# Altium PCB linkit-v4-0.2_6layers - Copie.PcbDoc (part 3 of 4)
Units mm, origin at the board's own origin, x right, y up, seen from the top; angles counter-clockwise.
Board outline 70 x 35 mm, 6 copper layers (Top Layer, Int1 (GND), Int2 (Sign), Int3 (Sign), Int4 (PWR), Bottom Layer), stack 1.551 mm thick; 193 components, 157 nets, 777 pads, 248 vias.
Unrouted connection lines stored in the file: 164.
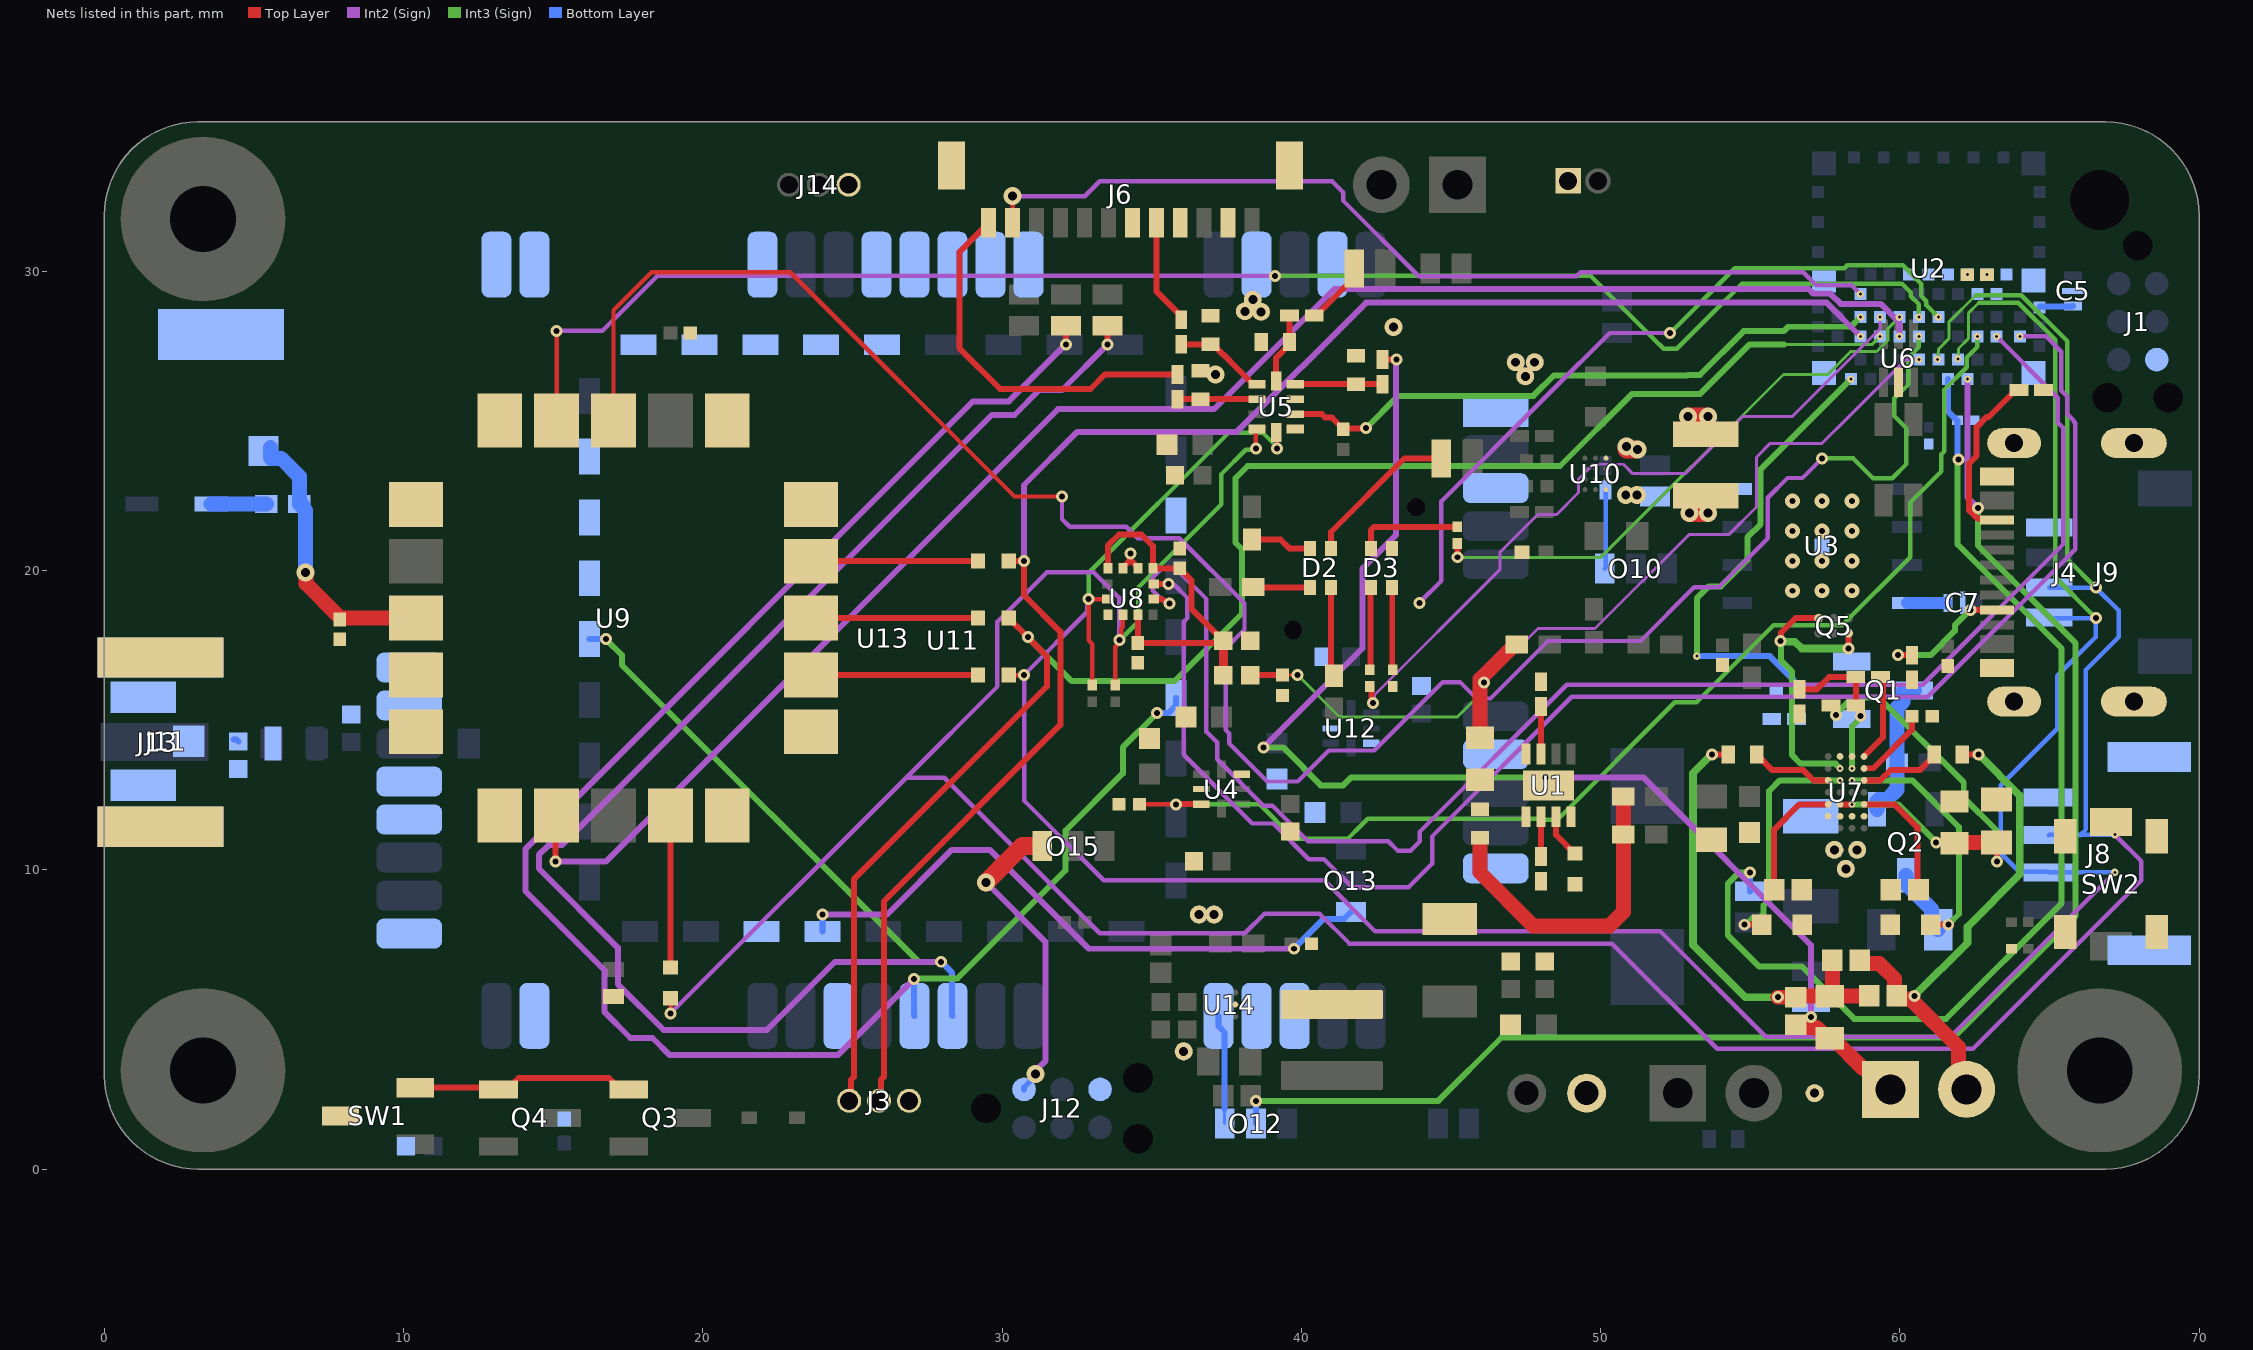
[diagram p6: the nets of this part, all layers, seen from the top]

## Part data (continued)
R41: "Thick Film Resistors - SMD 1/16watt 3.3Kohms 1% 100ppm", Manufacturer_Name=Vishay, Mouser Part Number=71-CRCW0402-3.3K-E3, Arrow Part Number=CRCW04023K30FKED, Arrow Price/Stock=https://www.arrow.com/en/products/crcw04023k30fked/vishay, Datasheet Link=http://www.vishay.com/docs/20035/dcrcwe3.pdf, Height=0.4mm, Manufacturer_Part_Number=CRCW04023K30FKED, Mouser Price/Stock=https://www.mouser.co.uk/ProductDetail/Vishay-Dale/CRCW04023K30FKED?qs=iv%252Be0Bc5VY2uvlCcTQHBWQ%3D%3D
R43 R44: "Thick Film Resistors - SMD 1/20watt 22ohms 1% 200ppm", Manufacturer_Name=Panasonic, Datasheet Link=https://industrial.panasonic.com/cdbs/www-data/pdf/RDP0000/AOA0000C334.pdf, Height=0.4mm, Manufacturer_Part_Number=ERJ-U02F22R0X
R45: "Thick Film Resistors - SMD 36.5Kohm 1% 200ppm", Manufacturer_Name=Vishay, Datasheet Link=http://www.vishay.com/docs/20035/dcrcwe3.pdf, Height=0.28mm, Manufacturer_Part_Number=CRCW020136K5FNED
R46 R49: "Thick Film Resistors - SMD 0 Ohms 50mW 0201 1%", Manufacturer_Name=KEMET, Mouser Part Number=603-RC0201FR-070RL, Arrow Part Number=RC0201FR-070RL, Arrow Price/Stock=https://www.arrow.com/en/products/rc0201fr-070rl/yageo?region=nac, Datasheet Link=http://www.yageo.com/documents/recent/PYu-RC0201_51_RoHS_L_8.pdf, Height=0.26mm, Manufacturer_Part_Number=RC0201FR-070RL, Mouser Price/Stock=https://www.mouser.co.uk/ProductDetail/YAGEO/RC0201FR-070RL?qs=LWWr1WFOkdETHfAClQk8Xg%3D%3D
R47: "Thick Film Resistors - SMD 1/20W 2.74Kohms 1% 200ppm", Manufacturer_Name=Vishay, Datasheet Link=http://www.vishay.com/docs/20035/dcrcwe3.pdf, Height=0.28mm, Manufacturer_Part_Number=CRCW02012K74FNED
R48: "Thick Film Resistors - SMD 1/20watt 100Kohms 5% 200ppm", Manufacturer_Name=Vishay, Mouser Part Number=71-CRCW0201100KJNED, Arrow Part Number=CRCW0201100KJNED, Arrow Price/Stock=https://www.arrow.com/en/products/crcw0201100kjned/vishay, Datasheet Link=http://www.vishay.com/docs/20035/dcrcwe3.pdf, Height=0.28mm, Manufacturer_Part_Number=CRCW0201100KJNED, Mouser Price/Stock=https://www.mouser.co.uk/ProductDetail/Vishay-Dale/CRCW0201100KJNED?qs=IQLUlsvFoXu8A8gHIw6owA%3D%3D
R50: "Thick Film Resistors - SMD 1/16watt 49.9Kohms 1%", Manufacturer_Name=Vishay, Mouser Part Number=71-CRCW0402-49.9K-E3, Arrow Part Number=CRCW040249K9FKED, Arrow Price/Stock=https://www.arrow.com/en/products/crcw040249k9fked/vishay?region=nac, Datasheet Link=http://www.vishay.com/docs/20035/dcrcwe3.pdf, Height=0.4mm, Manufacturer_Part_Number=CRCW040249K9FKED, Mouser Price/Stock=https://www.mouser.co.uk/ProductDetail/Vishay-Dale/CRCW040249K9FKED?qs=hAuyw6LW%252BLhwjtjsHx%2FGDQ%3D%3D
R52 R53 R54 R55 R56: "Thick Film Resistors - SMD CRCW 402 jumper", Manufacturer_Name=Vishay, Mouser Part Number=71-CRCW04020000Z0EEH, Arrow Part Number=CRCW04020000Z0EEHP, Arrow Price/Stock=https://www.arrow.com/en/products/crcw04020000z0eehp/vishay?utm_currency=USD&region=nac, Datasheet Link=http://www.vishay.com/docs/20035/dcrcwe3.pdf, Height=0.4mm, Manufacturer_Part_Number=CRCW04020000Z0EEHP, Mouser Price/Stock=https://www.mouser.co.uk/ProductDetail/Vishay-Dale/CRCW04020000Z0EEHP?qs=Imq1NPwxi74NTc567q7flQ%3D%3D
SW1: "Board Mount Hall Effect/Magnetic Sensors Integrated Digital Omnipolar, TMR, High Sensitivity Magnetic Switch, SOT23 Package, Ind Temp, 2Hz", Manufacturer_Name="Allegro MicroSystems", Mouser Part Number=462-CT8132BV-IS3, Datasheet Link=https://www.mouser.fr/datasheet/2/1115/Allegro_DS_CT813x_Datasheet_GS_FINAL_R2_v2-3441103.pdf, Height=1.4mm, Manufacturer_Part_Number=CT8132BV-IS3, Mouser Price/Stock=https://www.mouser.fr/ProductDetail/Allegro-MicroSystems/CT8132BV-IS3?qs=GBLSl2Akirsc7cUAudCqXg%3D%3D
SW2: "SW SPST PB 50MA 12V SMT CK variant", Manufacturer=C&K, Manufacturers Part Number="PTS820J2xM SMTR LFS", Supplier Part Number 1=611-PTS820J25MSMTR, Distributor 1=EBV, Distributor 2="Future Electronics", Supplier 1=Mouser, Supplier 2=Digi-Key, Supplier Part Number 2=CKN10505CT-ND
U1: "Battery Management 800-mA linear batter y charger for one-ce", Manufacturer_Name="Texas Instruments", Mouser Part Number=595-BQ25176MDSGR, Arrow Part Number=BQ25176MDSGR, Arrow Price/Stock=https://www.arrow.com/en/products/bq25176mdsgr/texas-instruments?region=nac, Datasheet Link=https://www.ti.com/lit/gpn/bq25176m, Height=0.8mm, Manufacturer_Part_Number=BQ25176MDSGR, Mouser Price/Stock=https://www.mouser.co.uk/ProductDetail/Texas-Instruments/BQ25176MDSGR?qs=Y0Uzf4wQF3nVhcdITj52nA%3D%3D
U2: "IC ISP Smart Bluetooth Module", Manufacturer=InsightSIP, Manufacturers Part Number=ISP1807-LR-ST, Temp Max=85, Temp Min=-40, Supplier 1=Rutronik, Supplier 2=Mouser, Supplier Part Number 1=ISP1807-LR-ST, Supplier Part Number 2=359-ISP1807-LR-ST, Supplier Unit Price 1=8.5
U3: "IC MEM SERIAL NOR FLASH QSPI 128Mb/16MB 3.6V 166MHz WSON8 6X5", Manufacturer=ISSI, Supplier Part Number 1=2901145, Temp Max=105, Temp Min=-40, Distributor 1=EBV, Distributor 2="Future Electronics", Manufacturers Part Number=IS25LP128F-JKLE, Supplier 1=Farnell, Supplier 2=Mouser, Supplier Part Number 2=870-IS25LP128FJKLETR
U4 U12: "Power Switch ICs - Power Distribution Low Input VTG Dual L oad Switch", Manufacturer_Name="Texas Instruments", Mouser Part Number=595-TPS22960RSER, Arrow Part Number=TPS22960RSER, Arrow Price/Stock=https://www.arrow.com/en/products/tps22960rser/texas-instruments?region=nac, Datasheet Link=https://www.ti.com/lit/ds/symlink/tps22960.pdf?ts=1638681846865&ref_url=https%253A%252F%252Fwww.google.com%252F, Height=0.6mm, Manufacturer_Part_Number=TPS22960RSER, Mouser Price/Stock=https://www.mouser.co.uk/ProductDetail/Texas-Instruments/TPS22960RSER?qs=EQxOuqCyzqQpKHLEcq5RSg%3D%3D
U5: "Analog to Digital Converters - ADC 16B ADC w/ Int MUX P GA Comp Osc & Ref A", Manufacturer_Name="Texas Instruments", Mouser Part Number=595-ADS1115IRUGR, Arrow Part Number=ADS1115IRUGR, Arrow Price/Stock=https://www.arrow.com/en/products/ads1115irugr/texas-instruments?utm_currency=USD&region=nac, Datasheet Link=https://www.ti.com/lit/ds/symlink/ads1115.pdf?ts=1601235703022&ref_url=https%253A%252F%252Fwww.ti.com%252Fproduct%252FADS1115%253FkeyMatch%253DADS1115IRUGR%2526tisearch%253DSearch-EN-everything%2526usecase%253DOPN, Height=0.4mm, Manufacturer_Part_Number=ADS1115IRUGR, Mouser Price/Stock=https://www.mouser.co.uk/ProductDetail/Texas-Instruments/ADS1115IRUGR?qs=IK5e5L0zOXhqw%2F8AHSSbuA%3D%3D
U6: "ESD Suppressors / TVS Diodes High Speed Interface Protection Low Cap", Manufacturer_Name=STMicroelectronics, Datasheet Link=https://datasheet.lcsc.com/szlcsc/STMicroelectronics-USBLC6-2P6_C15999.pdf, Height=0.6mm, Manufacturer_Part_Number=USBLC62P6
U7: "Wireless Charging ICs Wireless Pwr Receivr A 595-BQ51003YFPR", Manufacturer_Name="Texas Instruments", Mouser Part Number=595-BQ51003YFPT, Arrow Part Number=BQ51003YFPT, Arrow Price/Stock=https://www.arrow.com/en/products/bq51003yfpt/texas-instruments?region=nac, Datasheet Link=http://www.ti.com/lit/gpn/BQ51003, Height=0.5mm, Manufacturer_Part_Number=BQ51003YFPT, Mouser Price/Stock=https://www.mouser.co.uk/ProductDetail/Texas-Instruments/BQ51003YFPT?qs=QCUnHQQYO1rX6GZ4rUhwCg%3D%3D
U8: "IC AXL Accel/temp SPI/I2C 12LGA", Manufacturer="Bosch Sensortec", Supplier Part Number 1=828-1081-1-ND, Temp Max=85, Temp Min=-40, Manufacturers Part Number=BMA400, Supplier 1=Digi-Key, Supplier 2=Mouser, Supplier Part Number 2=262-BMA400
U9: "GNSS / GPS Modules u-blox M10 GNSS antenna module ROM, TCXO, SAW, LNA LGA, 16x16 mm", Manufacturer_Name=U-Blox, Mouser Part Number=377-SAM-M10Q-00B, Datasheet Link=https://content.u-blox.com/sites/default/files/documents/SAM-M10Q_DataSheet_UBX-22013293.pdf, Height=6.8mm, Manufacturer_Part_Number=SAM-M10Q-00B, Mouser Price/Stock=https://www.mouser.co.uk/ProductDetail/u-blox/SAM-M10Q-00B?qs=vvQtp7zwQdOaA6LplTUKjg%3D%3D
U10: "Switching Voltage Regulators 5.5-V buck-boost con verter with 75-nA op", Manufacturer_Name="Texas Instruments", Mouser Part Number=595-TPS63901YCJR, Arrow Part Number=TPS63901YCJR, Arrow Price/Stock=https://www.arrow.com/en/products/tps63901ycjr/texas-instruments?region=nac, Datasheet Link=https://www.ti.com/lit/ds/symlink/tps63901.pdf?ts=1658737279065&ref_url=https%253A%252F%252Fwww.ti.com%252Fproduct%252FTPS63901%253FkeyMatch%253DTPS63901YCJR%2526tisearch%253Dsearch-everything%2526usecase%253DOPN, Height=0.35mm, Manufacturer_Part_Number=TPS63901YCJR, Mouser Price/Stock=https://www.mouser.co.uk/ProductDetail/Texas-Instruments/TPS63901YCJR?qs=vvQtp7zwQdNZy3FE2e2hqg%3D%3D
U11: "KIM2 Module 48 pins 1.27mm pitch 36.6 x 25.4 x 5mm", Manufacturer=Kineis, Rating=3.3-5V, Tolerance="-30 /  +55°C", BOI="SMD48 36.6x25.4x5mm", DESIG="KIMFLEX Module 48 pins 1.27mm pitch 36.6 x 25.4 x 5mm", K P/N=-, Manufacturer P/N=KIM2, Supplier=Kineis, Supplier P/N=KIMFLEX, VAL=KIM2
U13: "Arribada SMD module Argos comunication with PA GR5504"
U14: "Switching Voltage Regulators 95-nA low IQ 5.5-V b oost converter with INLIMIT (1.9A)", Manufacturer_Name="Texas Instruments", Mouser Part Number=595-TPS612997YBHR, Arrow Part Number=TPS612997YBHR, Arrow Price/Stock=https://www.arrow.com/en/products/tps612997ybhr/texas-instruments?utm_currency=USD&region=nac, Datasheet Link=https://www.ti.com/lit/gpn/tps61299, Height=0.4mm, Manufacturer_Part_Number=TPS612997YBHR, Mouser Price/Stock=https://www.mouser.co.uk/ProductDetail/Texas-Instruments/TPS612997YBHR?qs=mELouGlnn3dLhnQxUdz5hw%3D%3D

## Via types
v1: diameter 0.6, hole 0.3, Top Layer to Int4 (PWR), 43 vias
v2: diameter 0.4, hole 0.2, Top Layer to Int3 (Sign), 42 vias
v3: diameter 0.25, hole 0.1, Int2 (Sign) to Bottom Layer, 23 vias
v4: diameter 0.6, hole 0.3, Int4 (PWR) to Bottom Layer, 20 vias
v5: diameter 0.4, hole 0.2, Int2 (Sign) to Bottom Layer, 20 vias
v6: diameter 0.4, hole 0.2, Top Layer to Int2 (Sign), 17 vias
v7: diameter 0.4, hole 0.2, Int3 (Sign) to Bottom Layer, 16 vias
v8: diameter 0.25, hole 0.1, Int3 (Sign) to Bottom Layer, 15 vias
v9: diameter 0.5, hole 0.2, Top Layer to Bottom Layer, 12 vias
v10: diameter 0.4, hole 0.2, Int2 (Sign) to Int3 (Sign), 10 vias
v11: diameter 0.25, hole 0.1, Top Layer to Bottom Layer, 7 vias
v12: diameter 0.6, hole 0.3, Top Layer to Bottom Layer, 6 vias
v13: diameter 0.226, hole 0.1, Top Layer to Int3 (Sign), 5 vias
v14: diameter 0.4, hole 0.2, Top Layer to Bottom Layer, 4 vias
v15: diameter 0.169, hole 0.1, Top Layer to Int3 (Sign), 2 vias
v16: diameter 0.6, hole 0.3, Top Layer to Int3 (Sign), 2 vias
v17: diameter 0.4, hole 0.2, Int4 (PWR) to Bottom Layer, 1 vias
v18: diameter 0.3, hole 0.2, Top Layer to Int1 (GND), 1 vias
v19: diameter 0.6, hole 0.3, Top Layer to Int2 (Sign), 1 vias
v20: diameter 0.25, hole 0.1, Int1 (GND) to Bottom Layer, 1 vias

## Nets (pads, with @x,y where several pads share a name; then routed paths per layer and width w, separated by ;. In a path a pad name is that pad's centre, name@x,y a point inside that pad or via, vN(x,y) a via of type N, cw(c..) or ccw(c..) an arc to the next point about the centre after c; other vN are vias at no path point)
ADC0: O7.2 R27.1 | length 39.4
  Top Layer w0.2: R27.1@42.718,27.052 v6(43.18,27.052)
  Int2 (Sign) w0.2: v10(38.735,14.097) 42.037,17.399 42.037,20.066 43.169,21.198 43.169,27.041 v6(43.18,27.052) ; v10(48.154,13.081) 51.435,13.081 57.023,7.493 v5(57.023,5.08)
  Int3 (Sign) w0.2: v10(38.735,14.097) 39.389,14.097 40.095,13.392 40.095,13.38 40.647,12.827 41.4,12.827 41.654,13.081 v10(48.154,13.081)
  Bottom Layer w0.2: v5(57.023,5.08) O7.2@57.023,5.575
ADC1: O8.2 R30.1 | length 2.2
  Top Layer w0.2: R30.1@40.428,28.522 40.541,28.522 40.641,28.622 40.641,28.664 41.77,29.794 O8.2@41.77,30.099
ADC2: J6.5 R32.1 | length 3.6
  Top Layer w0.2: J6.5@35.154,31.623 35.154,29.332 35.987,28.499 R32.1@35.987,28.387
ADC3: J6.12 R51.1 | length 12.6
  Top Layer w0.2: J6.12@29.554,31.623 28.575,30.644 28.575,27.432 29.937,26.07 32.954,26.07 33.436,26.552 R51.1@35.864,26.552
ADC_ALERT_RDY: R28.2 U2.64 U5.2 | length 20.6
  Top Layer w0.2: U5.2@39.797,25.228 40.685,25.228 40.798,25.115 41.021,25.115 41.402,24.734 41.413,24.744 42.143,24.744 v2(42.164,24.765)
  Int3 (Sign) w0.2: v2(42.164,24.765) 43.238,25.839 47.753,25.839 48.442,26.528 52.909,26.528 52.924,26.543 53.319,26.543 54.778,28.003 56.117,28.003 56.263,28.149 58.045,28.149 58.36,28.149 v8(58.685,28.474)
AGND: C14.2 C15.2 C16.2 C57.2 V?1.1 V?2.1 V?3.1 | length 0.6
  Top Layer w0.2: C57.2@36.626,26.678 36.687,26.617 37.071,26.617 v16(37.132,26.556)
  other v16: 43.076,28.133
BAT_AN: C4.2 O5.1 U2.38 | length 36.3
  Int3 (Sign) w0.2: v7(54.991,9.906) 54.61,9.906 54.248,9.544 54.248,7.816 55.288,6.776 56.724,6.776 58.474,5.026 61.541,5.026 65.405,8.89 65.405,17.399 61.924,20.88 61.924,23.676 v7(61.961,23.712)
  Bottom Layer w0.2: O5.1@54.991,9.284 v7(54.991,9.906) ; U2.38@61.61,26.399 61.61,25.313 61.904,25.019 C4.2@61.924,25.019 61.924,23.749 v7(61.961,23.712)
BAT_READ_EN: R3.2 R22.2 U2.48 | length 15.6
  Int3 (Sign) w0.2: v8(53.213,17.145) 53.213,19.072 53.618,19.477 54.021,19.477 54.902,20.358 54.902,21.109 55.346,21.553 55.346,23.385 57.107,25.146 v8(58.36,26.399)
  Bottom Layer w0.2: v8(53.213,17.145) 55.654,17.145 56.44,16.359 56.44,16.108 R22.2@56.546,16.002
BMA_PWR: C37.2 C38.2 R29.1 R31.2 U8.3 U8.7 U8.10 | length 12.2
  Top Layer w0.2: U8.10@33.54,20.079 33.54,20.843 33.906,21.209 34.654,21.209 35.04,20.823 U8.7@35.04,20.079 C37.2@35.941,20.079 35.941,20.059 36.322,19.678 36.322,18.727 R29.1@37.396,17.653 37.325,17.582 C38.2@34.537,17.582 34.54,17.586 U8.3@34.54,18.529
  Top Layer w0.3: R31.2@37.396,16.51 R29.1@37.396,17.653
BOOT1: C29.2 U7.C4 | length 4.2
  Top Layer w0.2: C29.2@55.798,9.328 55.798,11.348 56.642,12.192 U7.C4@57.601,12.192
BOOT2: C34.2 U7.C1 | length 4.2
  Top Layer w0.2: U7.C1@58.801,12.192 59.817,12.192 60.582,11.427 C34.2@60.582,9.328
CLAMP1: C23.2 U7.E3 | length 8.1
  Top Layer w0.2: v2(54.802,8.168) C23.2@55.388,8.168
  Int3 (Sign) w0.2: v2(54.802,8.168) 54.856,8.168 55.105,8.417 55.328,8.417 55.445,8.534 55.445,8.811 55.626,8.992 55.626,12.63 55.988,12.992 v13(58.001,12.992)
CLAMP2: C36.2 U7.E2 | length 8.2
  Top Layer w0.2: C36.2@61.029,8.168 v2(61.616,8.168)
  Int3 (Sign) w0.2: v13(58.401,12.992) 60.414,12.992 61.976,11.43 61.976,8.529 v2(61.616,8.168)
COIL-1: C24.1 C28.1 J7.1 | length 4.1
  Top Layer w0.5: C24.1@56.515,4.826 56.61,4.731 57.212,4.731 57.563,4.38 C28.1@57.658,4.38 57.753,4.38 58.766,3.367 58.99,3.367 J7.1@59.69,2.667
COIL-2: C32.1 C33.1 C34.1 C35.1 C36.1 J7.2 U7.B1 U7.B2 | length 17
  Top Layer w0.2: C35.1@62.09,13.862 v2(62.631,13.862)
  Top Layer w0.5: C32.1@58.661,6.987 58.661,6.972 58.756,6.877 59.312,6.877 59.825,6.364 59.825,5.866 C33.1@59.896,5.795 59.896,5.78 59.991,5.685 60.355,5.685 61.962,4.078 61.962,2.935 J7.2@62.23,2.667
  Int3 (Sign) w0.254: v2(60.482,5.795) 62.259,7.572 62.259,8.104 64.008,9.853 64.008,12.485 v2(62.631,13.862)
COMM1: C25.2 U7.E4 | length 2.7
  Top Layer w0.2: C25.2@55.212,13.862 55.739,13.335 56.769,13.335 57.112,12.992 U7.E4@57.601,12.992
COMM2: C35.2 U7.E1 | length 2.7
  Top Layer w0.2: U7.E1@58.801,12.992 59.347,12.992 59.69,13.335 60.663,13.335 C35.2@61.19,13.862
DCDC_3V3: D3.1 R29.2
GND: BT1.- C1.2 C2.1 C3.1 C4.1 C5.3 C6.1 C7.3 C8.2 C9.1 C10.2 C11.1 C12.1 C13.2 C17.1 C18.1 C19.1 C20.2 C21.2 C22.2 C26.2 C27.2 C30.2 C31.2 C37.1 C38.1 C39.2 C40.1 C43.1 C44.2 C45.2 C46.1 C47.1 C49.1 C58.2 J1.5 J2.1 J3.1 J4.A1_B12 J4.B1_A12 J4.SHIELD J5.2 J6.2 J6.4 J6.6 J6.13 J6.14 J8.4 J8.MP1 J8.MP2 J9.1 J11.1 J11.2 J12.5 J13.2 J14.1 O11.1 Q1.2 R6.2 R7.1 R8.1 R10.1 R11.1 R12.1 R18.1 R19.1 R20.1 R21.1 R22.1 R26.1 R33.1 R34.1 R37.2 R39.2 SW1.3 SW2.1 SW2.G1 SW2.G2 SW2.G3 SW2.G4 U1.4 U1.9 U2.1 U2.7 U2.14 U2.16 U2.18 U2.21 U2.23 U2.24 U2.25 U2.31 U3.4 U3.9 U4.3 U4.6 U5.1 U5.3 U6.2 U7.G2 U7.G3 U8.1 U8.8 U8.9 U9.1 U9.4 U9.5 U9.6 U9.10 U9.11 U9.15 U9.16 U9.20 U11.1@46.495,25.294 U11.3@46.495,22.754 U11.7@46.495,13.864 U11.10@46.495,10.054 U11.13@39.775,5.124 U11.14@38.505,5.124 U11.21@24.535,5.124 U11.24@14.375,5.124 U11.26@10.195,7.874 U11.29@10.195,11.684 U11.30@10.195,12.954 U11.32@10.195,15.494 U11.33@10.195,16.764 U11.34@13.105,30.224 U11.35@14.375,30.224 U11.36@21.995,30.224 U11.39@25.805,30.224 U11.42@29.615,30.224 U11.43@30.885,30.224 U11.45@38.505,30.224 U11.47@41.045,30.224 U12.3 U12.6 U13.6 U13.13 U13.14 U13.15 U13.16 U13.17 U13.19 U13.20 U13.21 U13.29 V1.2 V2.2 V3.2 V4.2 V5.2 V6.2 V7.2 V8.2 V9.2 V10.2 V?1.2 V?2.2 V?3.2 | length 0.9
  Top Layer w0.2: U8.9@34.04,20.079 34.04,20.104 34.252,20.316 34.252,20.536 v2(34.29,20.574) ; 34.328,20.316 34.54,20.104 U8.8@34.54,20.079
  other v9: 56.404,19.328 57.404,19.328 58.404,19.328 56.404,20.328 57.404,20.328 58.404,20.328 56.404,21.328 57.404,21.328 58.404,21.328 56.404,22.328 57.404,22.328 58.404,22.328
GPIO: J6.11 U2.9 | length 31.3
  Top Layer w0.146: v19(30.353,32.512) J6.11@30.354,31.623 J6.11@30.354,31.623
  Int2 (Sign) w0.146: v19(30.353,32.512) 32.766,32.512 33.266,33.012 41.027,33.012 41.395,32.644 41.395,32.364 43.921,29.837 49.197,29.837 49.331,29.972 56.134,29.972 56.769,29.972 57.212,29.529 58.391,29.529 v3(58.681,29.24)
GPS_INT: U2.61 U9.19 | length 52
  Top Layer w0.15: U9.19@15.118,25.015 v6(15.118,28.01)
  Int2 (Sign) w0.15: v6(15.118,28.01) 16.647,28.01 18.482,29.845 v10(39.117,29.845)
  Int3 (Sign) w0.15: v10(39.117,29.845) 49.671,29.845 51.795,27.721 52.105,27.411 52.543,27.411 53.633,28.501 54.723,29.591 60.067,29.591 60.363,29.295 60.363,29.172 60.635,28.9 v3(60.635,28.474)
GPS_NRST: U2.53 U9.18 | length 69.4
  Top Layer w0.146: U9.18@17.018,25.015 17.018,28.702 18.288,29.972 22.922,29.972 30.415,22.479 v6(32.004,22.479)
  Int2 (Sign) w0.146: v6(32.004,22.479) 32.004,21.717 32.258,21.463 34.146,21.463 34.527,21.082 35.924,21.082 38.1,18.906 38.1,18.034 37.473,17.407 37.473,14.676 37.592,14.557 37.592,14.224 38.862,12.954 39.878,12.954 40.913,13.989 42.437,13.989 44.723,16.275 45.303,16.275 45.849,15.729 46.319,15.729 48.239,17.649 51.329,17.649 53.13,19.45 53.956,19.45 55.583,21.077 55.583,22.436 56.242,23.095 56.742,23.095 v10(57.396,23.749)
  Int3 (Sign) w0.146: v10@57.404,23.749 58.441,23.749 59.103,23.087 59.742,23.087 60.217,23.562 60.217,24.755 59.817,25.155 59.817,25.754 60.283,26.22 60.283,27.118 60.635,27.47 v8(60.635,27.824)
GPS_PPS: U2.54 U9.7 | length 55.3
  Top Layer w0.2: v6(15.077,10.275) 15.077,11.774 U9.7@15.118,11.815
  Int2 (Sign) w0.2: v6(15.077,10.275) 16.752,10.275 31.877,25.4 37.084,25.4 41.094,29.41 56.134,29.41 56.945,29.41 57.099,29.256 57.677,29.256 58.018,28.915 59.354,28.915 59.985,28.283 v3(59.985,27.824)
GPS_PWR_EN: R21.2 U2.50 U4.7 | length 39.3
  Top Layer w0.15: R21.2@34.589,12.192 v2(35.814,12.192)
  Top Layer w0.2: v2(35.814,12.192) 35.818,12.196 36.659,12.196 U4.7@36.663,12.2
  Int3 (Sign) w0.15: v2(35.814,12.192) 38.608,12.192 39.751,11.049 41.558,11.049 42,11.491 42.214,11.705 47.985,11.705 48.006,11.684 48.564,11.684 52.479,15.598 53.204,15.598 55.788,18.182 58.077,18.182 60.346,20.451 60.346,22.274 61.389,23.317 61.389,23.889 61.489,23.989 61.489,26.052 62.235,26.798 62.235,27.123 62.585,27.473 v3(62.585,27.824)
GPS_UART_RX: J3.2 R40.2 U2.56 | length 55
  Top Layer w0.2: J3.2@25.892,2.286 25.951,2.345 25.951,2.986 26.051,3.086 26.051,8.946 31.95,14.845 31.95,17.961 30.734,19.177 v6(30.734,20.32) R40.2@30.226,20.32
  Int2 (Sign) w0.2: v6(30.734,20.32) 30.734,22.86 32.513,24.639 37.847,24.639 42.164,28.956 56.134,28.956 57.553,28.956 v3(58.685,27.824)
GPS_UART_TX: J3.3 R42.2 U2.55 | length 56
  Top Layer w0.2: J3.3@24.892,2.286 24.951,2.345 24.951,2.986 25.051,3.086 25.051,9.684 31.496,16.129 31.496,17.145 v2(30.861,17.78) 30.507,18.134 30.495,18.134 R42.2@30.335,18.294
  Int3 (Sign) w0.1: 56.134,27.549 59.06,27.549 v8(59.335,27.824)
  Int3 (Sign) w0.2: v2(30.861,17.78) 32.331,16.31 35.762,16.31 38.019,18.567 38.019,20.718 37.8,20.937 37.8,23.089 38.206,23.495 48.641,23.495 51.054,25.908 53.326,25.908 54.966,27.549 56.134,27.549
I2C_SCL: J8.2 J9.4 R1.1 R43.2 U2.37 U5.10 U8.12 | length 93.5
  Top Layer w0.15: R43.2@30.226,16.515 30.231,16.51 v6(30.734,16.51) ; R1.1@33.02,16.181 33.02,17.542 32.893,17.669 v2(32.893,19.05) 32.895,19.052 33.513,19.052 U8.12@33.515,19.054 ; U5.10@39.159,24.618 39.172,24.605 39.172,24.098 v2(39.184,24.085)
  Int2 (Sign) w0.15: v2(32.893,19.05) 32.849,19.006 32.849,18.625 v6(30.734,16.51) 30.734,12.319 33.401,9.652 40.767,9.652 42.474,7.945 51.999,7.945 55.52,4.424 61.691,4.424 v3(67.183,9.916)
  Int3 (Sign) w0.1: v3@61.954,27.093 61.954,27.419 62.285,27.749 62.285,28.598 62.643,28.956
  Int3 (Sign) w0.15: v2(32.893,19.05) 32.893,19.925 37.582,24.614 38.7,24.614 39.184,24.13 v2(39.184,24.085) ; v3(61.935,27.074) v3@61.954,27.093 ; 62.643,28.956 63.952,28.956 65.186,27.721 65.186,19.777 v7(66.548,18.415)
  Bottom Layer w0.15: J9.4@64.987,18.439 65.011,18.415 v7(66.548,18.415) 66.548,17.78 65.258,16.49 65.258,14.712 63.373,12.827 63.373,10.554 63.992,9.935 64.96,9.935 J8.2@64.979,9.916 v3(67.183,9.916)
I2C_SDA: J8.3 J9.3 R2.1 R44.1 U2.39 U5.9 U8.2 | length 113.9
  Top Layer w0.15: R44.1@18.918,5.71 18.923,5.706 v6(18.923,5.207) ; R2.1@33.782,16.181 33.782,17.458 33.979,17.655 33.979,18.068 34.04,18.129 U8.2@34.04,18.529 ; v2(38.481,24.085) 38.481,24.688 U5.9@38.521,24.728
  Int2 (Sign) w0.15: v6(18.923,5.207) 26.797,13.081 ; v2@33.909,17.653 33.909,19.089 33.059,19.939 31.496,19.939 29.845,18.288 29.845,16.129 26.797,13.081 ; v3(67.183,11.176) 68.072,10.287 68.072,9.652 62.44,4.02 53.892,4.02 50.371,7.541 41.608,7.541 40.619,8.53 38.756,8.53 38.106,7.88 33.268,7.88 28.067,13.081 26.797,13.081
  Int3 (Sign) w0.1: v8(61.261,27.06) 61.282,27.363 cw(c61.382,27.355) 61.311,27.426 61.635,27.75 61.635,28.302 62.539,29.206
  Int3 (Sign) w0.15: v2(33.931,17.675) 34.548,18.292 34.548,19.434 37.332,22.218 37.332,23.228 38.141,24.037 38.433,24.037 v2(38.481,24.085) ; 62.539,29.206 64.056,29.206 65.59,27.671 65.59,20.389 v7(66.548,19.431)
  Bottom Layer w0.15: J8.3@64.979,11.166 64.989,11.176 66.04,11.176 ; J9.3@64.987,19.439 64.995,19.431 v7(66.548,19.431) 67.31,18.669 67.31,17.783 66.216,16.689 66.216,11.352 66.04,11.176 ; 66.03,11.166 66.04,11.176 ; v3(67.183,11.176) 66.04,11.176
IMU_PWR: R18.2 R31.1 U2.41 | length 29
  Top Layer w0.1: R18.2@39.37,16.51 v2(39.878,16.51)
  Top Layer w0.2: R31.1@38.296,16.51 R18.2@39.37,16.51
  Int2 (Sign) w0.1: v10(46.101,16.256) 47.91,18.065 49.815,18.065 52.95,21.2 54.28,21.2 55.206,22.126 55.206,23.788 55.671,24.253 57.4,24.253 58.293,25.146 60.196,27.049 v3(60.635,27.049)
  Int3 (Sign) w0.1: v2(39.878,16.51) 41.275,15.113 45.212,15.113 46.081,15.982 46.081,16.236 v10(46.101,16.256)
INT1_IMU: U2.49 U8.5 | length 51.4
  Top Layer w0.2: U8.5@35.065,19.054 35.321,19.054 v2(35.599,18.901)
  Int2 (Sign) w0.15: v2(35.599,18.901) 35.531,18.901 35.407,19.025 35.341,19.025 35.031,19.335 35.031,19.773 35.341,20.083 35.797,20.083 36.83,19.05 36.83,14.619 37.19,14.259 37.19,13.693 38.731,12.152 39.029,12.152 40.215,10.966 42.455,10.966 42.465,10.957 42.904,10.957 43.214,10.647 43.653,10.647 43.963,10.957 43.963,11.282 48.866,16.185 60.762,16.185 65.451,20.874 65.451,24.772 65.278,24.945 65.278,25.781 v3(63.235,27.824)
INT2_IMU: U2.29 U8.6 | length 51.8
  Top Layer w0.2: U8.6@35.065,19.554 v6(35.56,19.554)
  Int2 (Sign) w0.15: v6(35.56,19.554) 35.598,19.516 35.768,19.516 36.195,19.089 36.195,18.415 36.068,18.288 36.068,13.843 38.36,11.551 39.059,11.551 40.248,10.361 40.756,10.361 41.698,9.419 43.582,9.419 44.367,10.204 44.367,11.114 49.034,15.781 60.929,15.781 65.855,20.707 65.855,24.939 65.815,24.979 65.815,25.013 65.682,25.146 65.599,25.229 65.599,25.813 65.395,26.017 65.395,27.315 64.886,27.824 v3(64.01,27.824)
KIM_I2C_SCL: U11.41@28.345,30.224
KIM_I2C_SDA: U11.40@27.075,30.224
KIM_PWR_ON: O12.2 U2.36 | length 50.1
  Int2 (Sign) w0.2: v3(62.26,26.399) 62.26,22.449 v10(62.611,22.098)
  Int3 (Sign) w0.2: v7(38.481,2.286) 44.577,2.286 46.69,4.399 61.803,4.399 65.859,8.455 65.859,17.587 62.611,20.835 v10(62.611,22.098)
  Bottom Layer w0.2: O12.2@38.481,1.524 v7(38.481,2.286)
KIM_RX: O2.1 U11.19@27.075,5.124 U13.3 | length 59.5
  Top Layer w0.2: v6(32.131,27.559) O2.1@32.131,28.181
  Int2 (Sign) w0.2: v5(27.051,6.35) 24.511,3.81 18.894,3.81 18.319,4.385 17.586,4.385 16.71,5.261 16.71,6.656 14.069,9.297 14.069,10.693 29.031,25.654 30.226,25.654 v6(32.131,27.559)
  Int3 (Sign) w0.2: v5(27.051,6.35) 27.078,6.377 28.511,6.377 32.12,9.986 32.12,11.314 34.036,13.229 34.036,14.097 v7(35.179,15.24)
  Bottom Layer w0.2: v5(27.051,6.35) 27.063,6.338 27.063,5.136 U11.19@27.075,5.124 ; v7(35.179,15.24) 35.187,15.248 35.564,15.248 35.814,15.498 U13.3@35.814,15.748
KIM_TX: O3.1 U11.18@28.345,5.124 U13.22 | length 62.9
  Top Layer w0.2: v6(33.528,27.559) O3.1@33.528,28.181
  Int2 (Sign) w0.2: v5(27.965,6.931) 24.419,6.931 22.141,4.653 18.694,4.653 17.164,6.183 17.164,7.405 14.523,10.046 14.523,10.504 14.848,10.829 15.288,10.829 29.659,25.2 30.414,25.2 31.249,26.035 32.004,26.035 v6(33.528,27.559)
  Int3 (Sign) w0.2: v5(16.764,17.714) 17.297,17.18 17.297,16.847 27.213,6.931 v5(27.965,6.931)
  Bottom Layer w0.2: U13.22@16.214,17.714 v5(16.764,17.714) ; v5(27.965,6.931) 28.333,6.563 28.333,5.136 U11.18@28.345,5.124
LED_B: R24.1 U2.63 | length 24.1
  Top Layer w0.2: R24.1@42.291,16.129 42.351,16.069 42.351,15.667 42.391,15.627 v6(42.391,15.573)
  Int2 (Sign) w0.1: v6(42.391,15.573) 42.448,15.63 42.448,15.842 46.632,20.026 46.632,20.608 47.903,21.879 48.532,21.879 49.263,22.61 49.263,23.064 49.754,23.555 50.762,23.555 51.076,23.241 52.832,23.241 54.737,25.146 56.396,25.146 59.335,28.085 v3(59.335,28.474)
LED_G: R25.1 U2.60 | length 24.6
  Top Layer w0.2: R25.1@43.046,16.122 R25.1@43.053,16.129
  Int2 (Sign) w0.15: v6(43.942,18.923) 44.683,19.664 44.683,20.228 44.683,20.666 44.683,22.319 47.968,25.604 48.336,25.973 50.304,27.94 v10(52.324,27.94)
  Int3 (Sign) w0.15: v10(52.324,27.94) 54.483,30.099 56.134,30.099 58.136,30.099 58.236,30.199 60.098,30.199 60.706,29.591 60.706,29.183 60.885,29.004 60.885,28.874 v8(61.285,28.474)
LED_R: R23.1 U2.62 | length 18.8
  Top Layer w0.2: v2(45.212,20.447) R23.1@45.212,20.903
  Int3 (Sign) w0.1: v2(45.212,20.447) 50.002,20.447 56.11,26.555 56.134,26.555 57.586,26.555 58.354,27.324 59.224,27.324 59.61,27.71 59.61,28.099 v8(59.985,28.474)
LX1: L2.1 U10.A1 | length 0.6
  Top Layer w0.6: v1(52.965,21.922) v1(53.586,21.922)
  other v1: 50.84,22.52 51.221,22.52
LX2: L2.2 U10.D1 | length 1.1
  Top Layer w0.6: v1(50.862,24.15) 50.862,24.051 50.871,24.042 v1(51.225,24.042) ; v1(52.92,25.146) v1(53.594,25.146)
NetBT1_+: BT1.+ C40.2 R41.1 U9.3 | length 9.3
  Top Layer w0.5: v12(6.731,19.939) 6.75,19.92 6.75,19.558 C40.2@7.874,18.434 ; C40.2@7.925,18.415 U9.3@10.418,18.415
  Bottom Layer w0.5: BT1.+@5.555,24.112 5.555,23.772 5.574,23.753 5.914,23.753 6.519,23.147 R41.1@6.519,22.225 ; R41.1@6.594,22.225 6.644,22.175 6.644,22.1 6.731,22.013 v12(6.731,19.939)
NetC2_2: C2.2 R53.1 U1.8 | length 3.7
  Top Layer w0.2: R53.1@47.127,17.526 R53.1@47.202,17.526
  Top Layer w0.5: C2.2@45.974,14.416 45.974,16.373 R53.1@47.127,17.526
NetC5_2: C5.2 U2.26 | length 1.1
  Bottom Layer w0.2: U2.26@64.66,28.799 64.683,28.822 65.763,28.822 C5.2@65.786,28.845
NetC7_2: C7.2 U3.8 | length 1.4
  Bottom Layer w0.302: C7.2@61.554,18.923 C7.2@61.603,18.923
  Bottom Layer w0.4: U3.8@60.244,18.923 60.544,18.923 C7.2@61.554,18.923
NetC14_1: C14.1 R27.2 U5.4 | length 2.9
  Top Layer w0.2: U5.4@39.797,26.228 R27.2@42.718,26.228
NetC15_1: C15.1 R30.2 U5.5 | length 2.5
  Top Layer w0.2: U5.5@39.159,26.338 39.159,27.113 39.604,27.558 C15.1@39.604,27.633 39.604,28.422 39.539,28.422 R30.2@39.639,28.522
NetC16_1: C16.1 R32.2 U5.6 | length 3.1
  Top Layer w0.2: R32.2@35.987,27.563 37.042,27.563 37.395,27.21 37.403,27.21 37.868,26.744 38.334,26.278 38.471,26.278 U5.6@38.521,26.228
NetC23_1: C23.1 C24.2 C25.1 C28.2 C29.1 C32.2 C33.2 U7.B3 U7.B4 | length 14.9
  Top Layer w0.2: v2(53.721,13.862) C25.1@54.262,13.862 ; C33.2@58.911,5.78 C33.2@58.976,5.715
  Top Layer w0.5: v2(55.929,5.746) C24.2@56.515,5.746 ; C24.2@56.549,5.78 C28.2@57.658,5.78 C33.2@58.911,5.78 ; C28.2@57.741,5.863 C32.2@57.741,6.987
  Int3 (Sign) w0.254: v2(53.721,13.862) 53.086,13.227 53.086,7.493 54.833,5.746 v2(55.929,5.746)
NetC30_1: C30.1 C31.1 R36.1 U7.C2 U7.C3 | length 15.7
  Top Layer w0.2: R36.1@57.697,15.494 57.768,15.494 57.868,15.394 v2(57.868,15.173) ; U7.C3@58.001,12.192 v13(58.401,12.192) ; v2(61.214,10.922) 61.794,10.922 C31.1@61.83,10.886 C31.1@61.86,10.916 ; v2(63.246,10.287) C30.1@63.246,10.897
  Top Layer w0.5: C31.1@61.86,10.916 C30.1@63.227,10.916 C30.1@63.246,10.897
  Int3 (Sign) w0.2: v2(57.868,15.173) 57.868,15.22 58.402,15.754 59.303,15.754 62.133,12.924 62.133,12.416 63.246,11.303 v2(63.246,10.287) ; v13(58.401,12.192) 59.944,12.192 v2(61.214,10.922)
NetC49_2: C49.2 J11.3 L3.1@5.635,14.224 | length 0.2
  Bottom Layer w0.2: C49.2@4.318,14.351 4.428,14.351 C49.2@4.481,14.298
NetC57_1: C57.1 R51.2 U5.7 | length 2.8
  Top Layer w0.2: R51.2@35.864,25.728 C57.1@36.626,25.728 U5.7@38.521,25.728 U5.7@38.519,25.73 ; C57.1@36.626,25.827 C57.1@36.723,25.73
NetC58_1: C58.1 R54.2 R56.2 U1.1 | length 10.7
  Top Layer w0.5: C58.1@45.974,10.993 45.974,9.906 47.752,8.128 50.292,8.128 50.758,8.594 R54.2@50.758,11.176 R56.2@50.758,12.446
NetD2_1: D2.1 O9.2 | length 5.3
  Top Layer w0.2: D2.1@40.99,20.742 40.99,21.292 43.447,23.749 O9.2@44.679,23.749
NetD2_2: D2.2 R13.1 | length 2.1
  Top Layer w0.2: R13.1@38.354,21.04 39.298,21.04 39.596,20.742 D2.2@40.29,20.742
NetD2_3: D2.3 R14.2 | length 1.9
  Top Layer w0.2: R14.2@38.396,19.457 38.411,19.442 D2.3@40.29,19.442
NetD2_4: D2.4 R15.1 | length 3
  Top Layer w0.2: D2.4@40.99,19.442 40.99,16.652 R15.1@41.148,16.494
NetD3_2: D3.2 R23.2 | length 3.5
  Top Layer w0.2: D3.2@42.322,20.742 42.322,21.346 42.439,21.463 R23.2@45.212,21.463
NetD3_3: D3.3 R24.2 | length 2.8
  Top Layer w0.2: R24.2@42.291,16.689 42.306,16.705 42.306,19.427 D3.3@42.322,19.442
NetD3_4: D3.4 R25.2 | length 2.8
  Top Layer w0.2: D3.4@43.022,19.442 43.038,19.427 43.038,16.705 R25.2@43.053,16.689
NetD4_1: D4.1 R41.2 | length 1.9
  Bottom Layer w0.5: D4.1@3.563,22.225 R41.2@5.419,22.225
NetJ4_A5: J4.A5 R34.2 | length 4.5
  Top Layer w0.2: v2(59.944,17.176) R34.2@60.401,17.176 ; v2(62.357,18.691) J4.A5@63.243,18.691
  Int3 (Sign) w0.2: v2(59.944,17.176) 61.027,17.176 61.838,17.987 61.838,18.172 v2(62.357,18.691)
NetJ4_B5: J4.B5 R33.2 | length 5.9
  Top Layer w0.2: J4.B5@63.243,21.691 62.818,21.691 62.768,21.741 62.587,21.741 62.314,22.014 62.314,23.588 62.564,23.838 62.564,24.796 62.904,25.136 62.965,25.136 62.976,25.146 63.865,26.035 R33.2@63.977,26.035
NetJ12_1: J12.1 O15.1 | length 10.4
  Top Layer w0.6: v12(29.462,9.582) 30.675,10.795 O15.1@31.344,10.795
  Int2 (Sign) w0.2: v12(29.462,9.582) 31.458,7.586 31.458,3.626 31.115,3.283 v12(31.115,3.175)
  Bottom Layer w0.2: J12.1@30.734,2.667 30.734,2.73 31.115,3.111 v12(31.115,3.175)
NetL5_2: L5.2 U14.B1
NetO10_1: O10.1 R48.2 | length 2.6
  Bottom Layer w0.146: O10.1@50.14,20.066 50.165,20.091 R48.2@50.165,22.692
NetO12_1: O12.1 U11.15@37.235,5.124 | length 3.7
  Bottom Layer w0.1: O12.1@37.44,1.524 O12.1@37.44,2.011
  Bottom Layer w0.2: U11.15@37.235,5.124 37.235,4.771 37.44,4.567 O12.1@37.44,2.011
NetO13_1: O13.1 U13.30 | length 21
  Int2 (Sign) w0.2: v5(24.003,8.509) 26.162,8.509 28.321,10.668 29.591,10.668 32.893,7.366 v5(39.751,7.366)
  Bottom Layer w0.2: U13.30@23.999,7.947 24.003,7.951 v5(24.003,8.509) ; v5(39.751,7.366) 40.75,8.365 41.426,8.365 O13.1@41.656,8.596
NetQ1_1: Q1.1 R3.1
NetQ1_3: Q1.3 Q2.1 R4.2 | length 4.8
  Bottom Layer w0.5: Q2.1@59.238,12.022 59.238,12.297 59.288,12.347 59.563,12.347 59.902,12.686 R4.2@59.902,13.589 59.902,15.418 60.111,15.627 60.111,15.952 60.161,16.002 Q1.3@60.486,16.002
NetQ2_3: Q2.3 R5.1 | length 2.3
  Bottom Layer w0.5: Q2.3@60.198,9.822 60.198,9.547 61.05,8.695 61.05,8.226 R5.1@61.275,8.001
NetQ3_1: Q3.1 Q4.1 SW1.2 | length 7.6
  Top Layer w0.2: SW1.2@10.414,2.794 10.394,2.774 SW1.2@10.394,2.728 13.109,2.728 Q4.1@13.174,2.663 13.524,2.663 13.724,2.863 13.724,2.931 13.841,3.048 16.859,3.048 16.976,2.931 16.976,2.863 17.176,2.663 Q3.1@17.526,2.663
NetQ5_A2: Q5.A2 Q5.C1 U7.F3 | length 10.4
  Top Layer w0.2: v2(56.007,17.653) 56.034,17.68 56.034,17.934 56.328,18.228 56.511,18.411 Q5.C1@57.285,18.411 ; v2(58.285,17.399) Q5.A2@58.285,17.911
  Int3 (Sign) w0.2: v2@56.021,17.639 56.021,17.004 56.388,16.637 56.388,13.843 56.678,13.553 57.84,13.553 v13(58.001,13.392)
  Int3 (Sign) w0.254: v2(56.007,17.653) 56.021,17.639 56.035,17.625 56.489,17.625 56.715,17.399 v2(58.285,17.399)
NetR10_2: R10.2 U1.3 | length 1.5
  Top Layer w0.2: U1.3@48.51,11.777 48.51,11.172 49.137,10.546 R10.2@49.149,10.546
NetR11_2: R11.2 U1.2 | length 1.3
  Top Layer w0.2: R11.2@48.01,10.445 U1.2@48.01,11.777
NetR12_2: R12.2 U1.7 | length 1.6
  Top Layer w0.2: R12.2@48.006,15.463 48.008,15.461 48.008,13.879 U1.7@48.01,13.877
NetR17_1: R17.1 U2.20
  other v11: 62.26,29.899
NetR17_2: R17.2 U2.22
  other v11: 62.91,29.899
NetR36_2: R36.2 R38.1 R39.1 U7.F2 | length 5.3
  Top Layer w0.2: R39.1@56.642,16.033 57.223,16.033 57.63,16.44 R38.1@58.525,16.44 58.525,15.498 R36.2@58.521,15.494 58.591,15.494 58.691,15.394 v2(58.691,15.136)
  Int3 (Sign) w0.2: v13(58.401,13.392) 58.401,14.792 58.691,15.082 v2(58.691,15.136)
NetR37_1: R37.1 U7.F1 | length 2.6
  Top Layer w0.2: U7.F1@58.801,13.392 58.806,13.397 59.117,13.397 60.401,14.681 R37.1@60.401,15.132
NetR38_2: R38.2 U7.G1 | length 2.9
  Top Layer w0.2: U7.G1@58.801,13.792 59.436,14.427 59.436,16.353 R38.2@59.349,16.44
NetR40_1: R40.1 U9.14 | length 5.6
  Top Layer w0.2: U9.14@23.618,20.315 23.623,20.32 R40.1@29.201,20.32
NetR42_1: R42.1 U9.13 | length 5.6
  Top Layer w0.2: U9.13@23.618,18.415 R42.1@29.201,18.415
NetR43_1: R43.1 U9.12 | length 5.6
  Top Layer w0.2: U9.12@23.618,16.515 R43.1@29.201,16.515
NetR44_2: R44.2 U9.9 | length 5.1
  Top Layer w0.2: R44.2@18.918,6.736 U9.9@18.918,11.815